# Altium PCB KSS_4_GPS.PcbDoc
Units mm, origin at the board's own origin, x right, y up, seen from the top; angles counter-clockwise.
Board outline 24 x 36 mm, 2 copper layers (Top Layer, Bottom Layer); 13 components, 14 nets, 66 pads, 3 vias.
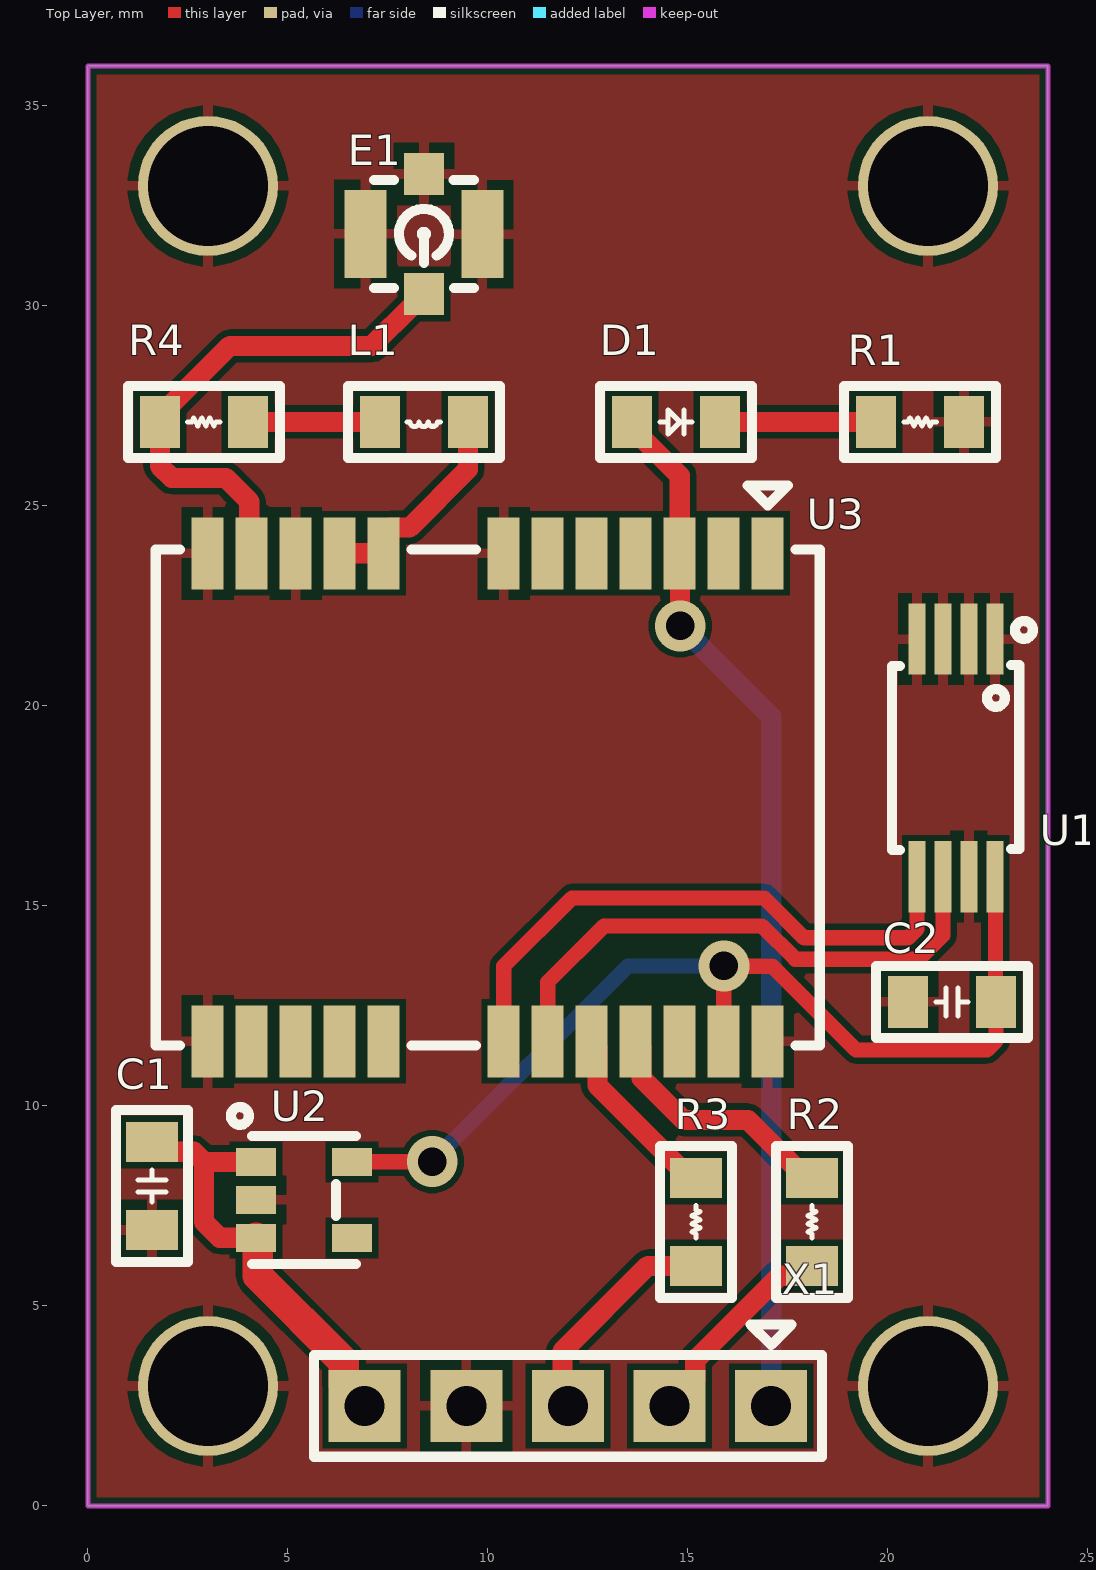
[diagram p0: Top Layer view]
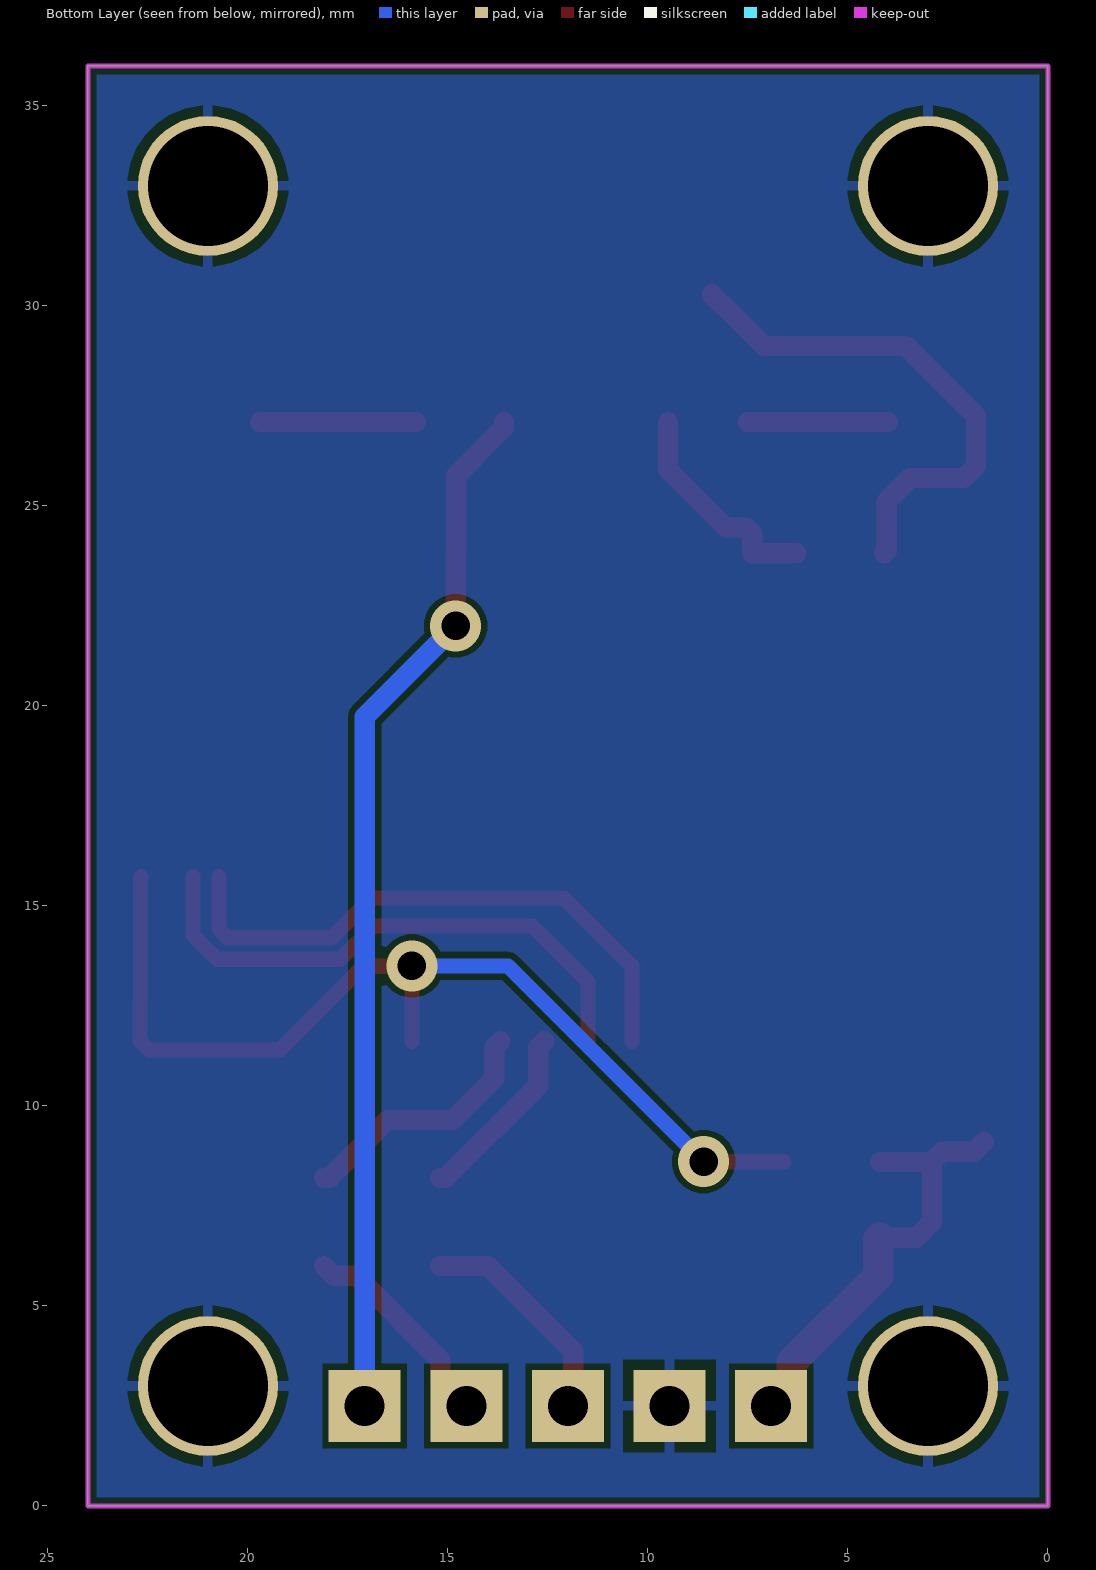
[diagram p1: Bottom Layer view, seen from below]

## Layer stack, top to bottom
Top Solder: solder mask 0.0102, Solder Resist, Dk 3.5
Top Layer: signal copper 0.0356
Dielectric 1: dielectric 0.32, FR-4, Dk 4.8
Bottom Layer: signal copper 0.0356
Bottom Solder: solder mask 0.0102, Solder Resist, Dk 3.5

## Board outline
0,0 0,36 24,36 24,0

## Design rules (kind name [scope] priority, off if disabled: settings)
Clearance [All] p1: gap=0.152 ignorepadtopadclearanceinfootprint=FALSE except(0: Arc-Hole Track-Hole SMDPad-Hole THPad-Hole Via-Hole Fill-Hole Poly-Hole Region-Hole Text-Hole)
PolygonConnect [All] p1: connectstyle=Relief reliefconductorwidth=0.254 reliefentries=4 polygonreliefangle="90 Angle" airgapwidth=0.254
RoutingVias [All] p1: holewidth=0.711 width=1.27 viastyle="Through Hole" minholewidth=0.711 minwidth=1.27 maxholewidth=0.711 maxwidth=1.27
SolderMaskExpansion [All] p1: expansion=0.102 istentingtop=FALSE
Width [All] p1: maxlimit=0.762 minlimit=0.254 preferedwidth=0.508
30 further rules are at their usual default settings.

## Components (designator, comment, footprint, x,y, rotation, side; value= is the part's Value field where it differs from the comment)
C1 "Capacitor" CAP_0805 1.6,8 r270 top
C2 "Capacitor" CAP_0805 21.6,12.6 r180 top
D1 "WH" LED_0805 14.7,27.1 r0 top
E1 "IPEX" IPEX 8.4,31.8 r180 top
L1 "Inductor" IND_0805 8.4,27.1 r0 top
R1 "Resistor" RES_0805 20.8,27.1 r0 top
R2 "Resistor" RES_0805 18.1,7.1 r90 top
R3 "Resistor" RES_0805 15.2,7.1 r90 top
R4 "Resistor" RES_0805 2.9,27.1 r180 top
U1 "24C32" TSSOP-8 21.7,18.7 r270 top
U2 "TC1015" SOT23_5_PIN 5.4,7.65 r270 top
U3 "NEO-6M-0-001" NEO-6M-0-001 9.995,17.714 r90 top
X1 "HEADER_X5" HEADER_1X5_M 17.08,2.5 r180 top

## Footprints (in the part's own frame and the unit in brackets; to place one, negate y for a bottom-side part, rotate by r counter-clockwise, add the part's x,y. Pads: shape width x height; smd on the part's side, far side on the other; paste and mask are expansions set on the pad)
CAP_0805 [mm]
  rect 1x1.3 smd: 1(-1.1,0) 2(1.1,0)
  silkscreen extent -1.9,-0.9 1.9,0.9, body extent -1,-0.63 1,0.63, height 1.01
HEADER_1X5_M [mm]
  rect 1.8x1.8 hole 1: 1(0,0) 2(2.54,0) 3(5.08,0) 4(7.62,0) 5(10.16,0)
  silkscreen extent -1.27,-2.03 11.43,1.27, body extent -1.27,-1.27 11.43,1.27, height 8.38
IND_0805 [mm]
  rect 1x1.3 smd: 1(-1.1,0) 2(1.1,0)
  silkscreen extent -1.9,-0.9 1.9,0.9, body extent -1,-0.6 1,0.6, height 0.95
IPEX [mm]
  rect 1x1.05 smd: 1(0,1.5) 2(0,-1.5)
  rect 1.05x2.2 smd: 2(-1.459,0.008) 2(1.459,0)
  silkscreen extent -1.25,-1.35 1.25,1.35, body extent -1.5,-1.3 1.5,1.55, height 1.28
LED_0805 [mm]
  rect 1x1.3 smd: 1(-1.1,0) 2(1.1,0)
  silkscreen extent -1.9,-0.9 1.9,0.9, body extent -1,-0.63 1,0.63, height 0.66
NEO-6M-0-001 [mm]
  rect 1.8x0.8 smd: 1(6.1,-7) 2(6.1,-5.9) 3(6.1,-4.8) 4(6.1,-3.7) 5(6.1,-2.6) 6(6.1,-1.5) 7(6.1,-0.4) 8(6.1,2.6) 9(6.1,3.7) 10(6.1,4.8) 11(6.1,5.9) 12(6.1,7) 13(-6.1,7) 14(-6.1,5.9) 15(-6.1,4.8) 16(-6.1,3.7) 17(-6.1,2.6) 18(-6.1,-0.4) 19(-6.1,-1.5) 20(-6.1,-2.6) 21(-6.1,-3.7) 22(-6.1,-4.8) 23(-6.1,-5.9) 24(-6.1,-7)
  silkscreen extent -6.2,-8.3 7.8,8.3, body extent -6.18,-8.3 6.18,8.3, height 2.64
RES_0805 [mm]
  rect 1x1.3 smd: 1(-1.1,0) 2(1.1,0)
  silkscreen extent -1.9,-0.9 1.9,0.9, body extent -1,-0.63 1,0.63, height 0.6
SOT23_5_PIN [mm]
  rect 0.7x1 smd: 1(-0.95,-1.2) 2(0,-1.2) 3(0.95,-1.2) 4(0.95,1.2) 5(-0.95,1.2)
  silkscreen extent -2.32,-1.82 1.6,1.3, body extent -1.5,-1.25 1.5,1.25, height 1.1
TSSOP-8 [mm]
  rect 1.78x0.42 smd: 1(-2.97,0.975) 2(-2.97,0.325) 3(-2.97,-0.325) 4(-2.97,-0.975) 5(2.97,-0.975) 6(2.97,-0.325) 7(2.97,0.325) 8(2.97,0.975)
  silkscreen extent -3.42,-1.6 2.3,1.92, body extent -3.2,-1.55 3.2,1.55, height 1.2

## Part data
C1 C2: Capacitance=1uF
D1: library part "Diode LED"
E1: library part Antenna
L1: Inductance=27nH
R1: Resistance=4.7k
R2 R3 R4: Resistance=10
U1: "Smart Serial EEPROM I2C"
U3: "GPS module"

## Free pads (board coordinates)
  round 3.5 hole 3: MH(3,3) MH(3,33) MH(21,3) MH(21,33)

## Via types
v1: diameter 1.27, hole 0.711, Top Layer to Bottom Layer, 3 vias

## Nets (pads, with @x,y where several pads share a name; then routed paths per layer and width w, separated by ;. In a path a pad name is that pad's centre, name@x,y a point inside that pad or via, vN(x,y) a via of type N, cw(c..) or ccw(c..) an arc to the next point about the centre after c; other vN are vias at no path point)
3V3: C2.1 U1.8 U2.5 U3.23 | length 25
  Top Layer w0.381: U2.5 6.604,8.604 8.604,8.604 v1(8.607,8.607) ; U3.23 15.897,11.616 15.897,13.497 v1(15.9,13.5) ; v1@15.997,13.403 16.088,13.493 17.107,13.493 19.2,11.4 22.477,11.4 22.7,11.623 C2.1 22.688,12.612 22.688,15.717 U1.8
  Bottom Layer w0.381: v1(8.607,8.607) 13.5,13.5 v1(15.9,13.5)
GND: C1.2 C2.2 E1.2 pad.MH R1.2 U1.1 U1.2 U1.3 U1.4 U1.7 U2.2 U3.7 U3.10 U3.12 U3.13 U3.24 X1.4
GSCL: U1.6 U3.19 | length 14
  Top Layer w0.381: U3.19 11.495,13.095 12.9,14.5 16.854,14.5 17.686,13.668 20.775,13.668 21.375,14.268 U1.6
GSDA: U1.5 U3.18 | length 14.7
  Top Layer w0.381: U3.18 10.395,13.495 12.1,15.2 16.909,15.2 17.907,14.202 20.502,14.202 20.725,14.425 U1.5
NetD1_2: D1.2 R1.1 | length 3.9
  Top Layer w0.508: D1.2 R1.1
NetE1_1: E1.1 R4.2 U3.11 | length 13.1
  Top Layer w0.508: U3.11 4.031,23.878 4.031,25.111 3.442,25.7 2.098,25.7 1.8,25.998 R4.2 1.8,27.25 3.55,29 7.1,29 8.129,30.029 8.154,30.029 8.4,30.275 E1.1
NetL1_1: L1.1 R4.1 | length 3.5
  Top Layer w0.508: R4.1 L1.1@7.506,27.1
NetL1_2: L1.2 U3.8 U3.9 | length 5.6
  Top Layer w0.508: U3.9 U3.8 7.395,24.314 7.541,24.46 8.041,24.46 9.5,25.919 L1.2
NetR2_2: R2.2 U3.21 | length 6.3
  Top Layer w0.508: U3.21 13.841,11.468 13.841,10.693 14.884,9.65 16.5,9.65 17.95,8.2 R2.2
NetR3_2: R3.2 U3.20 | length 4.6
  Top Layer w0.508: U3.20 12.741,11.468 12.741,10.509 15.05,8.2 R3.2
PPX: D1.1 U3.3 X1.1 | length 26.5
  Top Layer w0.508: D1.1 13.6,26.95 14.795,25.755 U3.3 14.801,23.808 14.801,22.006 v1(14.808,22)
  Bottom Layer w0.508: v1(14.808,22) 17.08,19.728 X1.1@17.08,2
RX: R2.1 X1.2 | length 5.3
  Top Layer w0.508: X1.2@14.364,2.824 14.864,2.824 15.186,3.146 15.186,3.646 17.294,5.754 17.854,5.754 R2.1
TX: R3.1 X1.3 | length 5.7
  Top Layer w0.508: X1.3@11.5,2.5 11.864,2.864 11.864,3.864 14,6 R3.1
VCC: C1.1 U2.1 U2.3 X1.5 | length 11.1
  Top Layer w0.508: C1.1 1.846,8.854 2.646,8.854 2.9,8.6 ; U2.3 4.194,6.706 3.294,6.706 2.9,7.1 2.9,8.6 ; U2.1 2.9,8.6
  Top Layer w0.762: U2.3 4.212,6.7 4.243,6.669 4.243,5.757 6.401,3.599 6.401,3.019 X1.5
pads on no net: U2.4 U3.1 U3.2 U3.4 U3.5 U3.6 U3.14 U3.15 U3.16 U3.17 U3.22

## Polygon pours and split planes (outlines as drawn)
GND on Bottom Layer "NONET_L-01_P-001" (solid, remove dead copper, pour order 0): 0,36 24,36 24,0 0,0
GND on Top Layer "NONET_L-01_P-001" (solid, remove dead copper, pour order 1): 0,36 24,36 24,0 0,0

## Keep-outs
Keep-Out Layer:
  the board outline again, w0.127